# EAGLE board PLT-01-RevA (EAGLE 9.6.2)
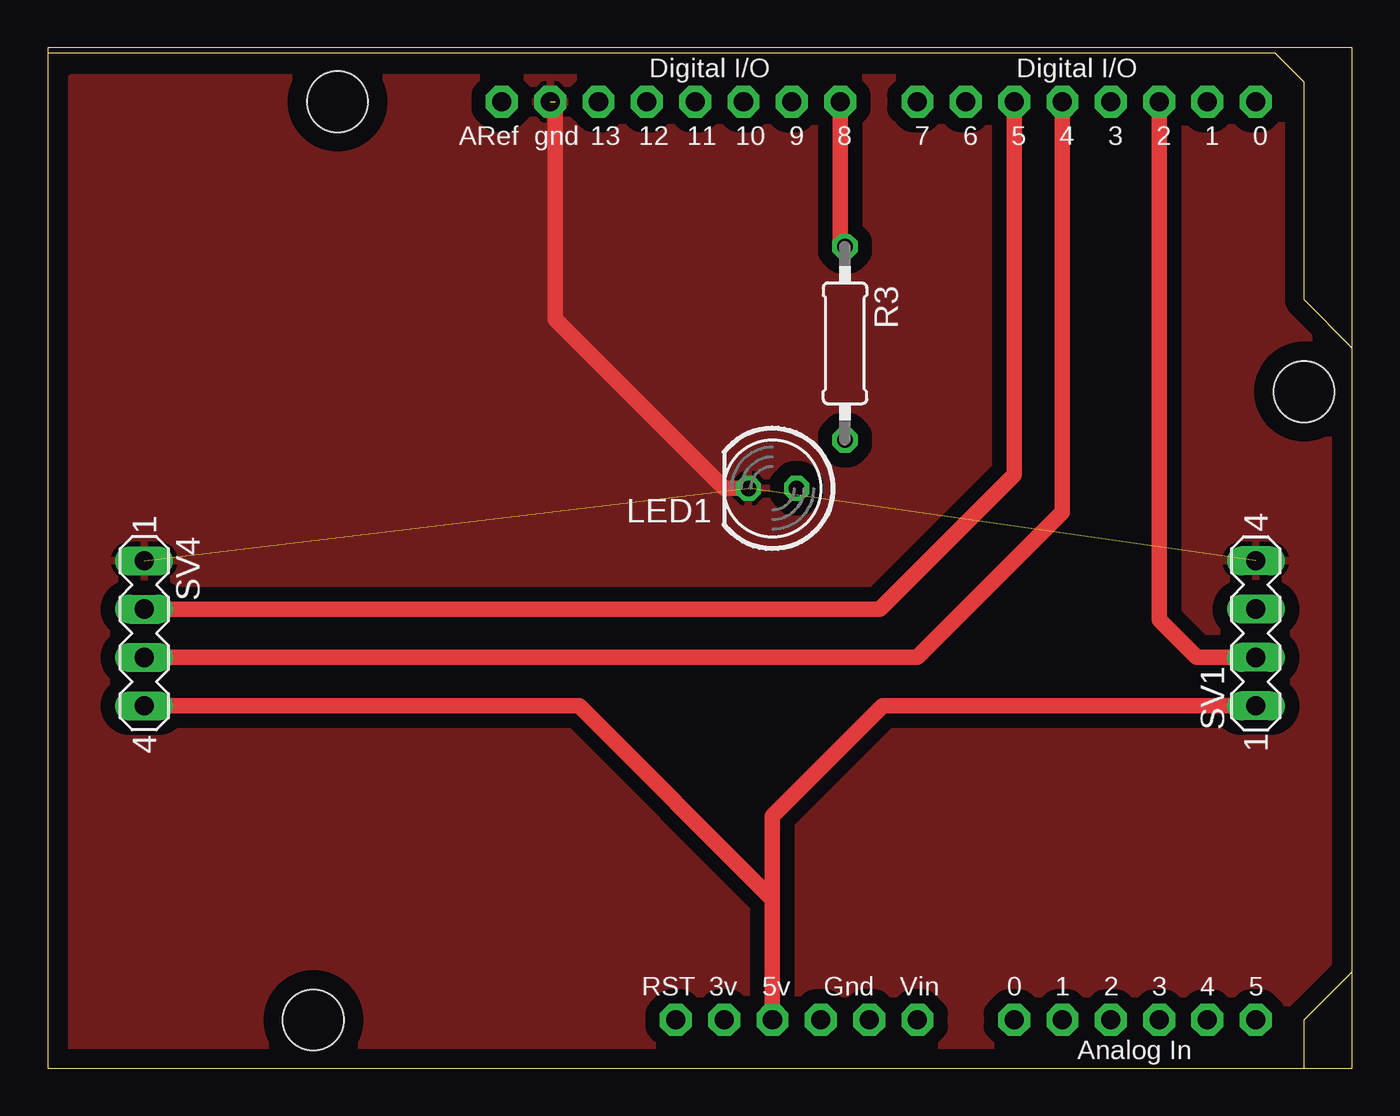
[diagram p0: board, top side]
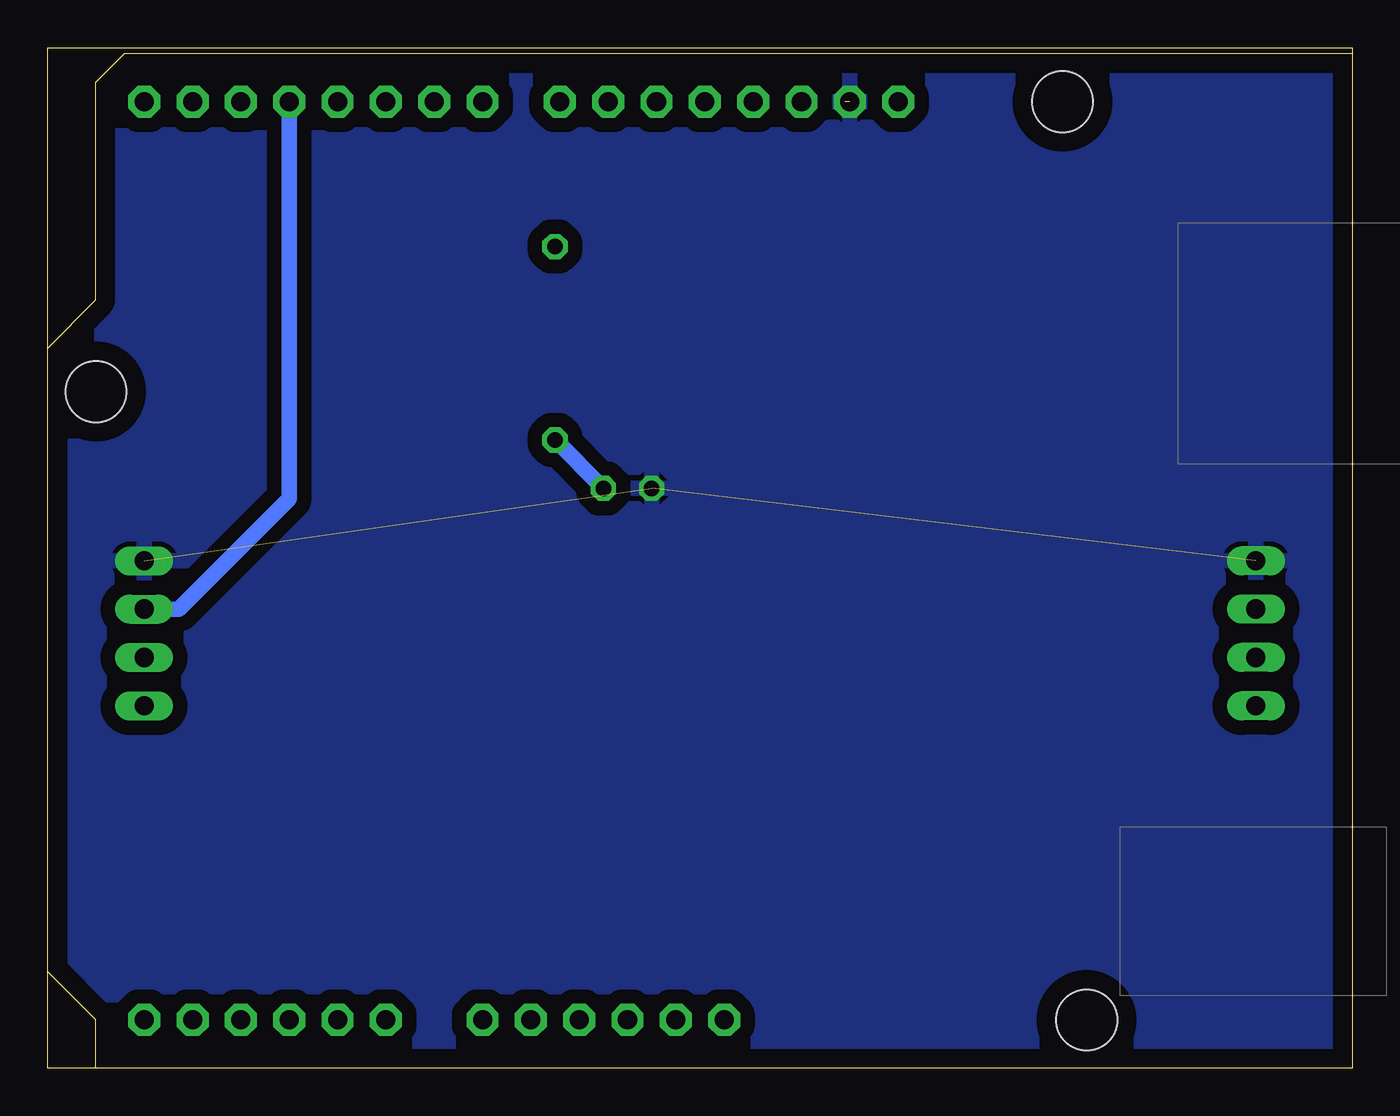
[diagram p1: board, bottom side, seen from below]

Size 68.58 x 53.64 mm. Coordinates in mm from the lower left corner, seen from the top.
Outline: 0,0 68.56,0 68.56,53.64 0,53.64 0,0
Copper layers (1*16): Top 0.035mm / dielectric 1.5mm / Bottom 0.035mm
Design rules "default *": minimum track width 10mil, minimum drill 24mil, track to track 30mil, track to pad 30mil, pad to pad 8mil, via to via 8mil, smd to smd 8mil, copper to edge 40mil, drill to drill 8mil, minimum pad ring 10mil, minimum via ring 8mil, stop-mask expansion 4mil, vias tented up to drill 0mil, thermal gap 10mil

## Footprints (pad centres in the part's own frame; a part is rotated, then mirrored left to right if it is on the bottom)
LED5MM = drill 0.813 octagon: A -1.27,0; K 1.27,0
0207/10 = drill 0.813 octagon: 1 -5.08,0; 2 5.08,0
MA04-1 = drill 1.016 long: 1 -3.81,0; 2 -1.27,0; 3 1.27,0; 4 3.81,0
ARDUINO = drill 1 pad 1.676 octagon: 3V 35.56,2.54; 5V 38.1,2.54; A0 50.8,2.54; A1 53.34,2.54; A2 55.88,2.54; A3 58.42,2.54; A4 60.96,2.54; A5 63.5,2.54; AREF 23.876,50.8; D0 63.5,50.8; D1 60.96,50.8; D2 58.42,50.8; D3 55.88,50.8; D4 53.34,50.8; D5 50.8,50.8; D6 48.26,50.8; D7 45.72,50.8; D8 41.656,50.8; D9 39.116,50.8; D10 36.576,50.8; D11 34.036,50.8; D12 31.496,50.8; D13 28.956,50.8; GND 26.416,50.8; GND1 43.18,2.54; GND2 40.64,2.54; RESET 33.02,2.54; VIN 45.72,2.54 | hole 3.2: 15.24,50.8; 66.04,35.56; 13.97,2.54

## Placement (x,y rotation side)
LED1  [LED5MM]  38.1,30.48 180 top
R3  [0207/10]  41.91,38.1 270 top
SV1  [MA04-1]  63.5,22.86 90 top
SV4  [MA04-1]  5.08,22.86 270 top
U$1  ARDUINOUNO  [ARDUINO]  0,0 0 top

## Library data of the parts
LED1 = led
R3 = resistor
SV1 SV4 = con-lstb; OC_FARNELL: unknown; OC_NEWARK: unknown
U$1 = adafruit

## Nets
3V: U$1.3V
5V: SV1.1 SV4.4 U$1.5V
GND: LED1.K SV1.4 SV4.1 U$1.GND
GND1: U$1.GND1
GND2: U$1.GND2
N$10: R3.1 U$1.D8
N$12: LED1.A R3.2
P2A: SV1.2 U$1.D2
P3A: SV1.3 U$1.D3
P4A: SV4.3 U$1.D4
P5A: SV4.2 U$1.D5
P6A: U$1.D6
P7A: U$1.D7
VIN: U$1.VIN

## Tracks (layer width: path | path; a pad name or v marks a point on that pad's centre or on a via)
5V
  Top 0.813: SV1.1 43.89,19.05 38.1,13.26 U$1.5V 38.1,8.89 27.94,19.05 SV4.4
GND  (3 unrouted)
  Top 0.813: LED1.K 35.56,30.48 26.67,39.37 26.67,50.8
  pour Top: 1.27,52.07 1.27,0 67.31,0 67.31,52.07
  pour Bottom: 1.27,52.07 1.27,1.27 67.31,1.27 67.31,52.07
N$10
  Top 0.813: U$1.D8 41.66,43.43 R3.1
N$12
  Bottom 0.813: R3.2 LED1.A
P2A
  Top 0.813: SV1.2 60.4,21.59 58.42,23.57 U$1.D2
P3A
  Bottom 0.813: SV1.3 61.67,24.13 55.88,29.92 U$1.D3
P4A
  Top 0.813: SV4.3 45.72,21.59 53.34,29.21 U$1.D4
P5A
  Top 0.813: SV4.2 43.74,24.13 50.8,31.19 U$1.D5